# EAGLE board BMS Segment rev9 (EAGLE 9.2.2), part 1 of 2
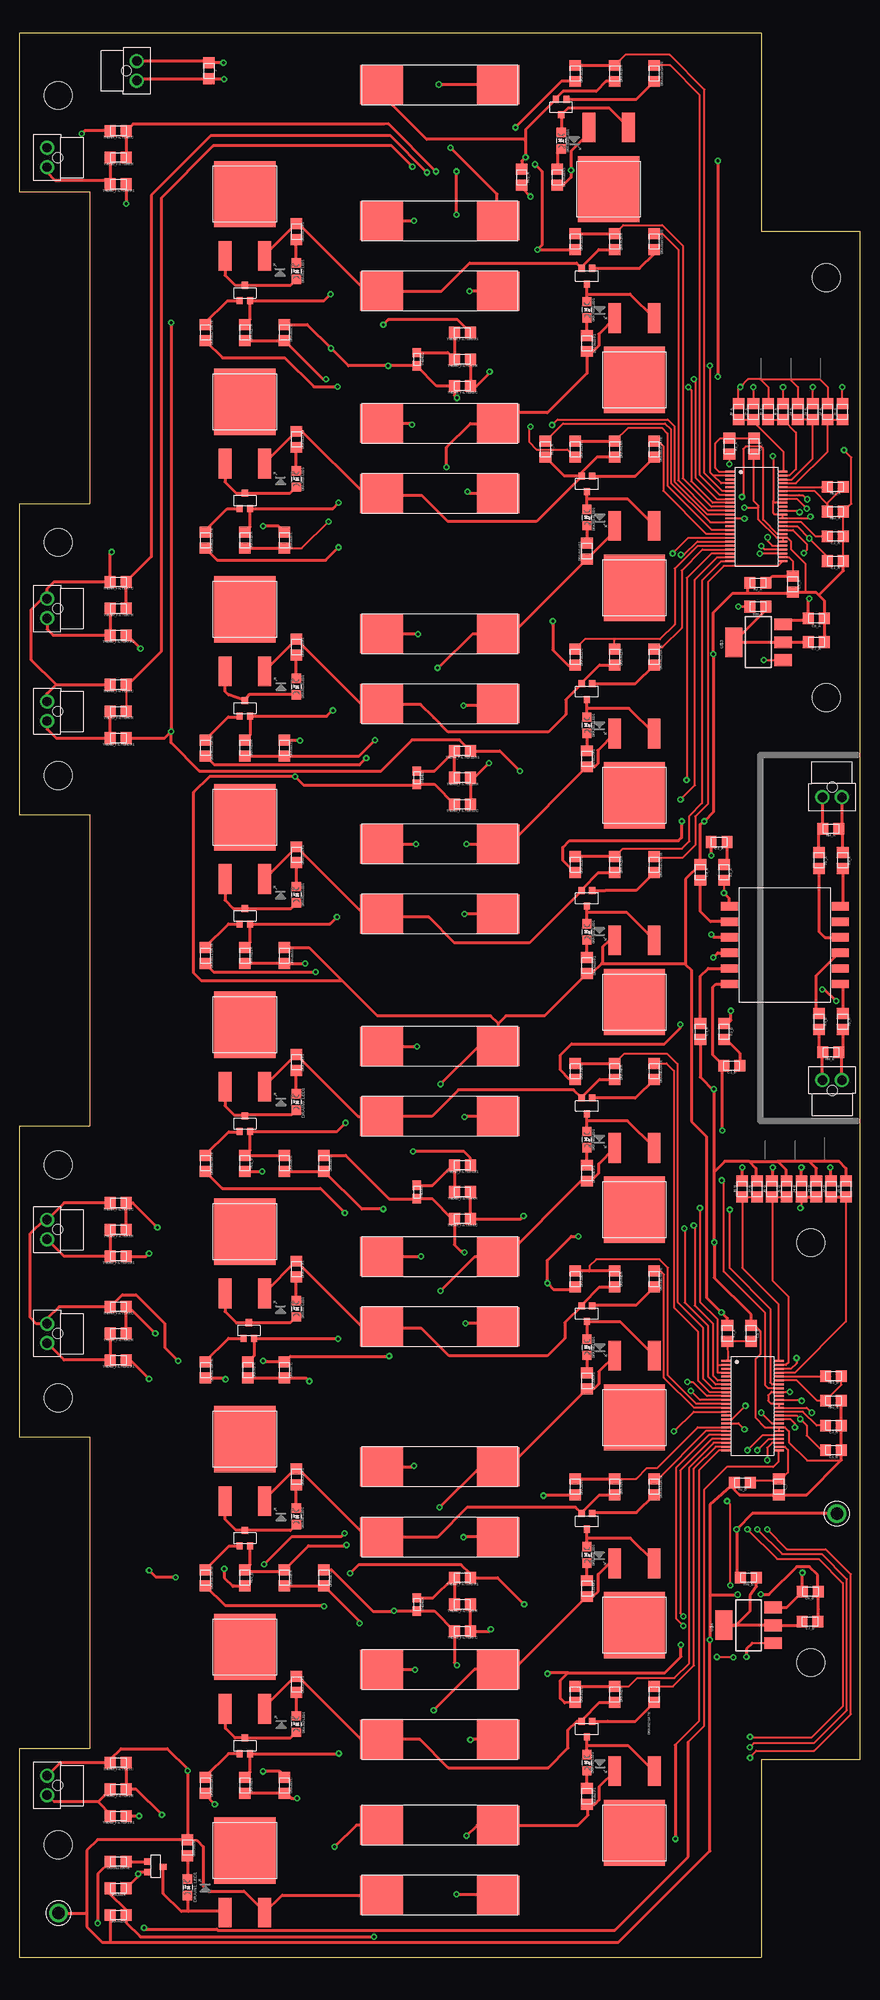
[diagram p0: board, top side]
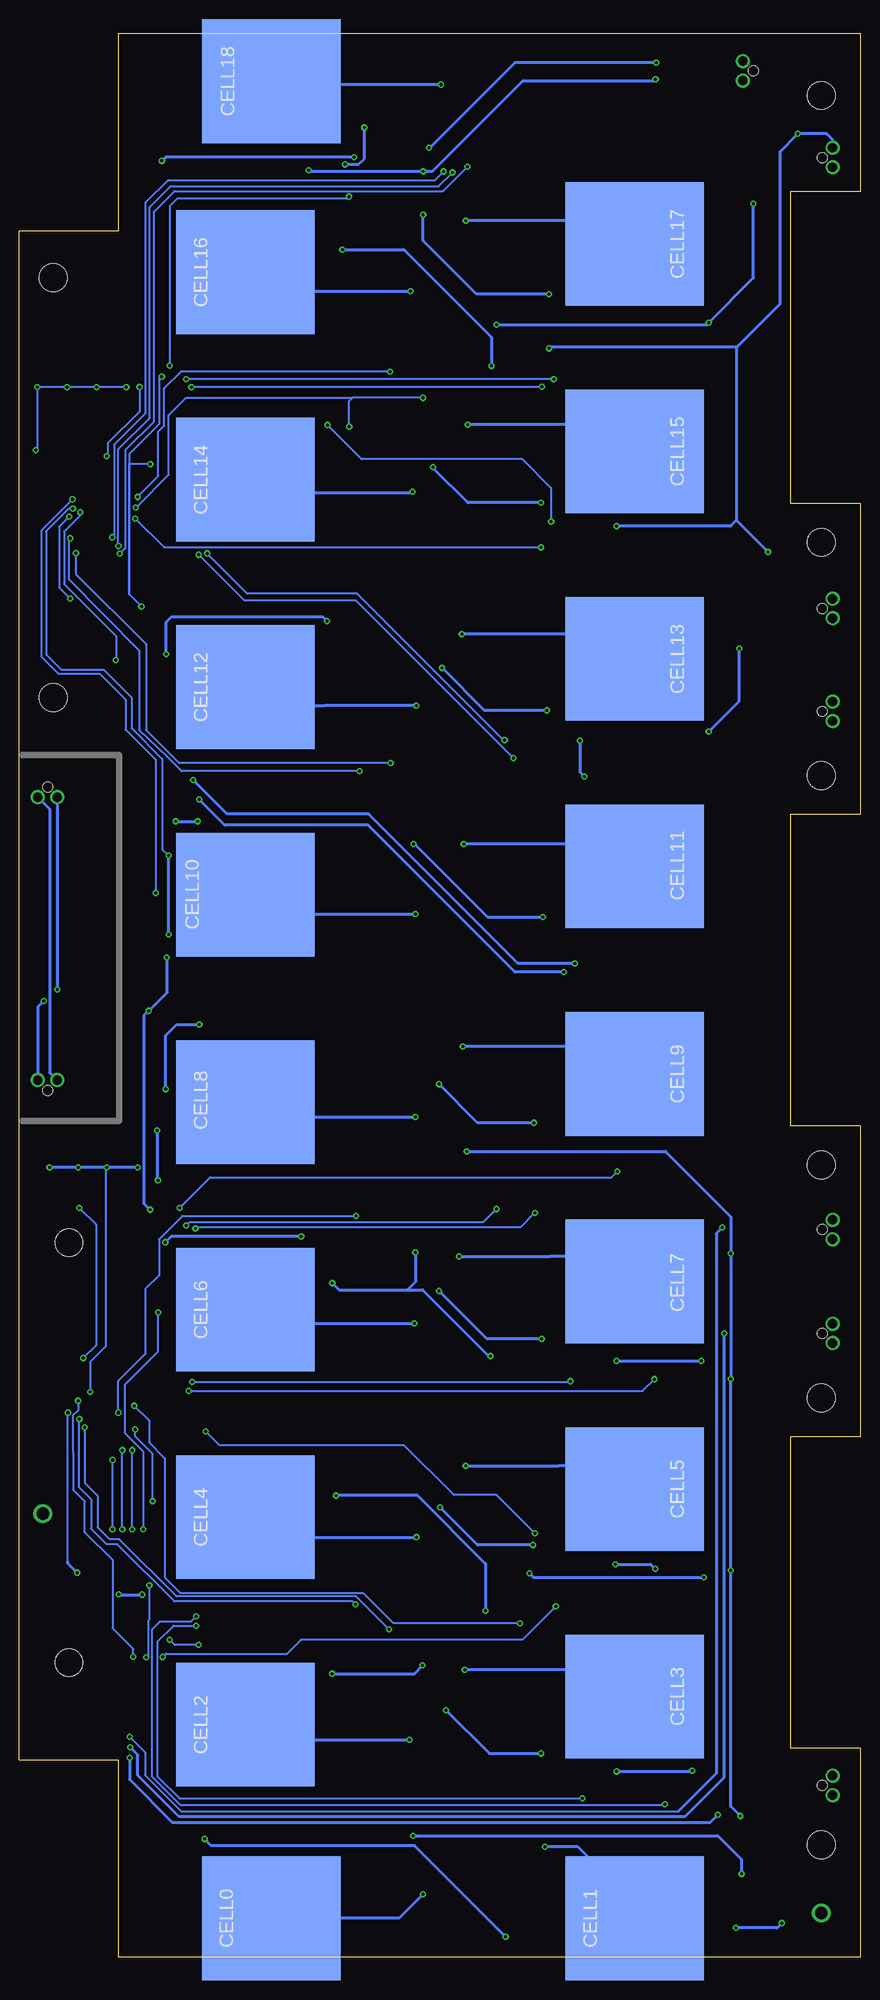
[diagram p1: board, bottom side, seen from below]

Size 108 x 247.11 mm. Coordinates in mm from the lower left corner, seen from the top.
Outline: 9,226.72 9,186.72 0,186.72 0,146.78 9,146.78 9,106.78 0,106.78 0,66.84 9,66.84 9,26.84 0,26.84 0,0 95.3,0 95.3,25.4 108,25.4 108,221.71 95.3,221.71 95.3,247.11 0,247.11 0,226.72 9,226.72
Copper layers (1*16): Top 0.035mm / dielectric 1.5mm / Bottom 0.035mm
Design rules "DRC Advanced Circuits": minimum track width 6mil, minimum drill 15mil, track to track 6mil, track to pad 6mil, pad to pad 6mil, via to via 6mil, smd to smd 6mil, copper to edge 40mil, drill to drill 6mil, minimum pad ring 10mil, minimum via ring 8mil, stop-mask expansion 4mil, vias tented up to drill 0mil, thermal gap 10mil
Net classes: 1 unfused_hv: clearance 0.025 mm to class 0, clearance 3.2 mm
Holes 3.6 mm at 5,239.11 5,181.73 5,151.78 5,101.78 5,71.84 5,14.46 101.65,37.86 101.65,91.78 103.65,161.78 103.65,215.71

## Footprints (pad centres in the part's own frame; a part is rotated, then mirrored left to right if it is on the bottom)
NANO-FIT_VERTICAL-2 = drill 1.2: P$1 -1.25,0; P$2 1.25,0 | hole 1.3: 0,-1.34
0805 = smd 1.4 x 1.5: 1 -1.025,0; 2 1.025,0
KEYSTONE5222 = smd 15.875 x 17.78: P$1 0,0
PWR163 = smd 1.651 x 3.81: 1 -2.54,-7.938; 2 2.54,-7.938 | smd 7.874 x 8.509: PAD 0,0
LED-805 = smd 1.2 x 1.2: A 0,-1.05; C 0,1.05
SOT23 = smd 0.8 x 0.9: 1 -0.675,-1; 2 0.675,-1; 3 0,1
5X20MM_FUSE = smd 5.5 x 5: P$1 -7.5,0; P$2 7.5,0
0603 = smd 1.2 x 1.1: 1 -0.85,0; 2 0.85,0
HM2102NLT = smd 1.067 x 2.184: P$1 0,0; P$2 2,0; P$3 4,0; P$4 6,0; P$5 8,0; P$6 10,0; P$7 10,14.25; P$8 8,14.25; P$9 6,14.25; P$10 4,14.25; P$11 2,14.25; P$12 0,14.25
LTC6804 = smd 0.25 x 1.25: 1 -5.75,-3.37; 2 -5.25,-3.37; 3 -4.75,-3.37; 4 -4.25,-3.37; 5 -3.75,-3.37; 6 -3.25,-3.37; 7 -2.75,-3.37; 8 -2.25,-3.37; 9 -1.75,-3.37; 10 -1.25,-3.37; 11 -0.75,-3.37; 12 -0.25,-3.37; 13 0.25,-3.37; 14 0.75,-3.37; 15 1.25,-3.37; 16 1.75,-3.37; 17 2.25,-3.37; 18 2.75,-3.37; 19 3.25,-3.37; 20 3.75,-3.37; 21 4.25,-3.37; 22 4.75,-3.37; 23 5.25,-3.37; 24 5.75,-3.37; 25 5.75,3.38; 26 5.25,3.38; 27 4.75,3.38; 28 4.25,3.38; 29 3.75,3.38; 30 3.25,3.38; 31 2.75,3.38; 32 2.25,3.38; 33 1.75,3.38; 34 1.25,3.38; 35 0.75,3.38; 36 0.25,3.38; 37 -0.25,3.38; 38 -0.75,3.38; 39 -1.25,3.38; 40 -1.75,3.38; 41 -2.25,3.38; 42 -2.75,3.38; 43 -3.25,3.38; 44 -3.75,3.38; 45 -4.25,3.38; 46 -4.75,3.38; 47 -5.25,3.38; 48 -5.75,3.38
SOT223 = smd 1.5 x 2.235: 1 -2.3,-3.15; 2 0,-3.15; 3 2.3,-3.15 | smd 3.8 x 2.2: 4 0,3.15
TEST_POINT = drill 1.6: P$1 0,0

## Placement (x,y rotation side)
AMS_TEST_PORT1  CONNECTOR-2NANO-FIT_VERTICAL-2  [NANO-FIT_VERTICAL-2]  15.08,242.28 270 top
C1_A  1uF  [0805]  104.82,179.31 0 top
C1_B  1uF  [0805]  104.56,65.14 0 top
C2_A  1uF  [0805]  104.82,182.49 0 top
C2_B  1uF  [0805]  104.56,68.31 0 top
C3_A  15pF  [0805]  89.87,143.24 180 top
C3_B  15pF  [0805]  91.49,114.5 180 top
C4_A  10nF  [0805]  87.46,139.35 90 top
C4_B  10nF  [0805]  87.46,118.9 270 top
C5_A  10nF  [0805]  99.33,176.34 270 top
C6_A  0.1uF  [0805]  94.36,194.06 270 top
C6_B  0.1uF  [0805]  93.98,80.14 90 top
C7_A  0.1uF  [0805]  102.36,168.91 0 top
C7_B  0.1uF  [0805]  101.55,43.13 0 top
C8_A  1uF  [0805]  102.36,171.96 0 top
C8_B  1uF  [0805]  101.6,46.99 0 top
C_5  10nF  [0805]  97.54,60.45 270 top
CELL0  BATTERY_SPRING_KEYSTONE5222  [KEYSTONE5222]  75.66,5.04 270 bottom
CELL1  BATTERY_SPRING_KEYSTONE5222  [KEYSTONE5222]  29,5.04 270 bottom
CELL2  BATTERY_SPRING_KEYSTONE5222  [KEYSTONE5222]  79,29.89 270 bottom
CELL3  BATTERY_SPRING_KEYSTONE5222  [KEYSTONE5222]  29,33.52 270 bottom
CELL4  BATTERY_SPRING_KEYSTONE5222  [KEYSTONE5222]  79,56.54 270 bottom
CELL5  BATTERY_SPRING_KEYSTONE5222  [KEYSTONE5222]  29,60.16 270 bottom
CELL6  BATTERY_SPRING_KEYSTONE5222  [KEYSTONE5222]  79,83.19 270 bottom
CELL7  BATTERY_SPRING_KEYSTONE5222  [KEYSTONE5222]  29,86.81 270 bottom
CELL8  BATTERY_SPRING_KEYSTONE5222  [KEYSTONE5222]  79,109.83 270 bottom
CELL9  BATTERY_SPRING_KEYSTONE5222  [KEYSTONE5222]  29,113.46 270 bottom
CELL10  BATTERY_SPRING_KEYSTONE5222  [KEYSTONE5222]  79,136.48 270 bottom
CELL11  BATTERY_SPRING_KEYSTONE5222  [KEYSTONE5222]  29,140.11 270 bottom
CELL12  BATTERY_SPRING_KEYSTONE5222  [KEYSTONE5222]  79,163.13 270 bottom
CELL13  BATTERY_SPRING_KEYSTONE5222  [KEYSTONE5222]  29,166.75 270 bottom
CELL14  BATTERY_SPRING_KEYSTONE5222  [KEYSTONE5222]  79,189.78 270 bottom
CELL15  BATTERY_SPRING_KEYSTONE5222  [KEYSTONE5222]  29,193.4 270 bottom
CELL16  BATTERY_SPRING_KEYSTONE5222  [KEYSTONE5222]  79,216.42 270 bottom
CELL17  BATTERY_SPRING_KEYSTONE5222  [KEYSTONE5222]  29,220.05 270 bottom
CELL18  BATTERY_SPRING_KEYSTONE5222  [KEYSTONE5222]  75.66,240.93 270 bottom
DRAIN1:C  10nF  [0805]  12.7,5.46 180 top
DRAIN1:DISCHARGE  5R  [PWR163]  28.96,13.72 0 top
DRAIN1:GATE  3K3  [0805]  12.7,12.32 180 top
DRAIN1:LED1  RED  [LED-805]  21.59,9.02 0 top
DRAIN1:PFET  P-CHANNEL_MOSFET_DMP3099L-7  [SOT23]  17.48,11.66 270 top
DRAIN1:R  100R  [0805]  12.7,8.89 180 top
DRAIN1:R1  150R  [0805]  21.59,14.1 270 top
DRAIN2:C  10nF  [0805]  71.37,33.78 270 top
DRAIN2:DISCHARGE  5R  [PWR163]  79,16 180 top
DRAIN2:GATE  3K3  [0805]  81.53,33.78 90 top
DRAIN2:LED1  RED  [LED-805]  72.9,25.02 180 top
DRAIN2:PFET  P-CHANNEL_MOSFET_DMP3099L-7  [SOT23]  72.9,29.34 180 top
DRAIN2:R  100R  [0805]  76.45,33.78 90 top
DRAIN2:R1  150R  [0805]  72.9,20.7 90 top
DRAIN3:C  10nF  [0805]  34.04,22.1 90 top
DRAIN3:DISCHARGE  5R  [PWR163]  28.96,39.88 0 top
DRAIN3:GATE  3K3  [0805]  23.88,22.1 270 top
DRAIN3:LED1  RED  [LED-805]  35.56,29.97 0 top
DRAIN3:PFET  P-CHANNEL_MOSFET_DMP3099L-7  [SOT23]  28.96,27.18 0 top
DRAIN3:R  100R  [0805]  28.96,22.1 270 top
DRAIN3:R1  150R  [0805]  35.56,35.05 270 top
DRAIN4:C  10nF  [0805]  71.37,60.45 270 top
DRAIN4:DISCHARGE  5R  [PWR163]  78.99,42.67 180 top
DRAIN4:GATE  3K3  [0805]  81.53,60.45 90 top
DRAIN4:LED1  RED  [LED-805]  72.9,51.69 180 top
DRAIN4:PFET  P-CHANNEL_MOSFET_DMP3099L-7  [SOT23]  72.9,56.01 180 top
DRAIN4:R  100R  [0805]  76.45,60.45 90 top
DRAIN4:R1  150R  [0805]  72.9,47.37 90 top
DRAIN5:C  10nF  [0805]  39.12,48.77 90 top
DRAIN5:DISCHARGE  5R  [PWR163]  28.96,66.55 0 top
DRAIN5:GATE  3K3  [0805]  23.88,48.77 270 top
DRAIN5:LED1  RED  [LED-805]  35.56,56.64 0 top
DRAIN5:PFET  P-CHANNEL_MOSFET_DMP3099L-7  [SOT23]  28.96,53.85 0 top
DRAIN5:R  100R  [0805]  34.04,48.77 270 top
DRAIN5:R1  150R  [0805]  35.56,61.72 270 top
DRAIN6:C  10nF  [0805]  71.37,87.12 270 top
DRAIN6:DISCHARGE  5R  [PWR163]  79,69.34 180 top
DRAIN6:GATE  3K3  [0805]  81.53,87.12 90 top
DRAIN6:LED1  RED  [LED-805]  72.9,78.36 180 top
DRAIN6:PFET  P-CHANNEL_MOSFET_DMP3099L-7  [SOT23]  72.9,82.68 180 top
DRAIN6:R  100R  [0805]  76.45,87.12 90 top
DRAIN6:R1  150R  [0805]  72.9,74.04 90 top
DRAIN7:C  10nF  [0805]  34.04,75.44 90 top
DRAIN7:DISCHARGE  5R  [PWR163]  28.96,93.22 0 top
DRAIN7:GATE  3K3  [0805]  23.88,75.44 270 top
DRAIN7:LED1  RED  [LED-805]  35.56,83.31 0 top
DRAIN7:PFET  P-CHANNEL_MOSFET_DMP3099L-7  [SOT23]  29.46,80.52 0 top
DRAIN7:R  100R  [0805]  29.34,75.44 270 top
DRAIN7:R1  150R  [0805]  35.56,88.39 270 top
DRAIN8:C  10nF  [0805]  71.37,113.79 270 top
DRAIN8:DISCHARGE  5R  [PWR163]  78.99,96.01 180 top
DRAIN8:GATE  3K3  [0805]  81.53,113.79 90 top
DRAIN8:LED1  RED  [LED-805]  72.9,105.03 180 top
DRAIN8:PFET  P-CHANNEL_MOSFET_DMP3099L-7  [SOT23]  72.9,109.35 180 top
DRAIN8:R  100R  [0805]  76.45,113.79 90 top
DRAIN8:R1  150R  [0805]  72.9,100.71 90 top
DRAIN9:C  10nF  [0805]  39.12,101.98 90 top
DRAIN9:DISCHARGE  5R  [PWR163]  28.96,119.76 0 top
DRAIN9:GATE  3K3  [0805]  23.88,101.98 270 top
DRAIN9:LED1  RED  [LED-805]  35.56,109.86 0 top
DRAIN9:PFET  P-CHANNEL_MOSFET_DMP3099L-7  [SOT23]  28.96,107.06 0 top
DRAIN9:R  100R  [0805]  34.04,101.98 270 top
DRAIN9:R1  150R  [0805]  35.56,114.94 270 top
DRAIN10:C  10nF  [0805]  71.37,140.34 270 top
DRAIN10:DISCHARGE  5R  [PWR163]  78.99,122.68 180 top
DRAIN10:GATE  3K3  [0805]  81.53,140.34 90 top
DRAIN10:LED1  RED  [LED-805]  72.9,131.7 180 top
DRAIN10:PFET  P-CHANNEL_MOSFET_DMP3099L-7  [SOT23]  72.9,136.02 180 top
DRAIN10:R  100R  [0805]  76.45,140.34 90 top
DRAIN10:R1  150R  [0805]  72.9,127.38 90 top
DRAIN11:C  10nF  [0805]  34.04,128.65 90 top
DRAIN11:DISCHARGE  5R  [PWR163]  28.96,146.43 0 top
DRAIN11:GATE  3K3  [0805]  23.88,128.65 270 top
DRAIN11:LED1  RED  [LED-805]  35.56,136.47 0 top
DRAIN11:PFET  P-CHANNEL_MOSFET_DMP3099L-7  [SOT23]  28.96,133.73 0 top
DRAIN11:R  100R  [0805]  28.96,128.65 270 top
DRAIN11:R1  150R  [0805]  35.56,141.6 270 top
DRAIN12:C  10nF  [0805]  71.37,167 270 top
DRAIN12:DISCHARGE  5R  [PWR163]  78.99,149.22 180 top
DRAIN12:GATE  3K3  [0805]  81.53,167 90 top
DRAIN12:LED1  RED  [LED-805]  72.9,158.24 180 top
DRAIN12:PFET  P-CHANNEL_MOSFET_DMP3099L-7  [SOT23]  72.9,162.56 180 top
DRAIN12:R  100R  [0805]  76.45,167 90 top
DRAIN12:R1  150R  [0805]  72.9,153.92 90 top
DRAIN13:C  10nF  [0805]  34.04,155.32 90 top
DRAIN13:DISCHARGE  5R  [PWR163]  28.96,173.1 0 top
DRAIN13:GATE  3K3  [0805]  23.88,155.32 270 top
DRAIN13:LED1  RED  [LED-805]  35.56,163.19 0 top
DRAIN13:PFET  P-CHANNEL_MOSFET_DMP3099L-7  [SOT23]  28.96,160.4 0 top
DRAIN13:R  100R  [0805]  28.96,155.32 270 top
DRAIN13:R1  150R  [0805]  35.56,168.28 270 top
DRAIN14:C  10nF  [0805]  71.37,193.68 270 top
DRAIN14:DISCHARGE  5R  [PWR163]  78.99,175.9 180 top
DRAIN14:GATE  3K3  [0805]  81.53,193.68 90 top
DRAIN14:LED1  RED  [LED-805]  72.9,184.91 180 top
DRAIN14:PFET  P-CHANNEL_MOSFET_DMP3099L-7  [SOT23]  72.9,189.23 180 top
DRAIN14:R  100R  [0805]  76.45,193.68 90 top
DRAIN14:R1  150R  [0805]  72.9,180.59 90 top
DRAIN15:C  10nF  [0805]  34.04,181.99 90 top
DRAIN15:DISCHARGE  5R  [PWR163]  28.96,199.77 0 top
DRAIN15:GATE  3K3  [0805]  23.88,181.99 270 top
DRAIN15:LED1  RED  [LED-805]  35.56,189.87 0 top
DRAIN15:PFET  P-CHANNEL_MOSFET_DMP3099L-7  [SOT23]  28.96,187.07 0 top
DRAIN15:R  100R  [0805]  28.96,181.99 270 top
DRAIN15:R1  150R  [0805]  35.56,194.94 270 top
DRAIN16:C  10nF  [0805]  71.37,220.34 270 top
DRAIN16:DISCHARGE  5R  [PWR163]  78.99,202.56 180 top
DRAIN16:GATE  3K3  [0805]  81.53,220.34 90 top
DRAIN16:LED1  RED  [LED-805]  72.9,211.58 180 top
DRAIN16:PFET  P-CHANNEL_MOSFET_DMP3099L-7  [SOT23]  72.9,215.9 180 top
DRAIN16:R  100R  [0805]  76.45,220.34 90 top
DRAIN16:R1  150R  [0805]  72.9,207.26 90 top
DRAIN17:C  10nF  [0805]  34.04,208.66 90 top
DRAIN17:DISCHARGE  5R  [PWR163]  28.96,226.44 0 top
DRAIN17:GATE  3K3  [0805]  23.88,208.66 270 top
DRAIN17:LED1  RED  [LED-805]  35.56,216.53 0 top
DRAIN17:PFET  P-CHANNEL_MOSFET_DMP3099L-7  [SOT23]  28.96,213.74 0 top
DRAIN17:R  100R  [0805]  28.96,208.66 270 top
DRAIN17:R1  150R  [0805]  35.56,221.62 270 top
DRAIN18:C  10nF  [0805]  71.37,241.94 270 top
DRAIN18:DISCHARGE  5R  [PWR163]  75.69,227.08 180 top
DRAIN18:GATE  3K3  [0805]  81.53,241.94 90 top
DRAIN18:LED1  RED  [LED-805]  69.6,233.3 180 top
DRAIN18:PFET  P-CHANNEL_MOSFET_DMP3099L-7  [SOT23]  69.6,237.62 180 top
DRAIN18:R  100R  [0805]  76.45,241.94 90 top
DRAIN18:R1  150R  [0805]  69.09,228.6 90 top
F0  0001.2704.11  [5X20MM_FUSE]  54,8 180 top
F1  0001.2704.11  [5X20MM_FUSE]  54,17 0 top
F2  0001.2704.11  [5X20MM_FUSE]  54,28 180 top
F3  0001.2704.11  [5X20MM_FUSE]  54,37 0 top
F4  0001.2704.11  [5X20MM_FUSE]  54,54 180 top
F5  0001.2704.11  [5X20MM_FUSE]  54,63 0 top
F6  0001.2704.11  [5X20MM_FUSE]  54,81 180 top
F7  0001.2704.11  [5X20MM_FUSE]  54,90 0 top
F8  0001.2704.11  [5X20MM_FUSE]  54,108 180 top
F9  0001.2704.11  [5X20MM_FUSE]  54,117 0 top
F10  0001.2704.11  [5X20MM_FUSE]  54,134 180 top
F11  0001.2704.11  [5X20MM_FUSE]  54,143 0 top
F12  0001.2704.11  [5X20MM_FUSE]  54,161 180 top
F13  0001.2704.11  [5X20MM_FUSE]  54,170 0 top
F14  0001.2704.11  [5X20MM_FUSE]  54,188 180 top
F15  0001.2704.11  [5X20MM_FUSE]  54,197 0 top
F16  0001.2704.11  [5X20MM_FUSE]  54,214 180 top
F17  0001.2704.11  [5X20MM_FUSE]  54,223 0 top
F18  0001.2704.11  [5X20MM_FUSE]  54,240.48 180 top
ISOSPI_A  CONNECTOR-2NANO-FIT_VERTICAL-2  [NANO-FIT_VERTICAL-2]  104.39,148.98 180 top
ISOSPI_B  CONNECTOR-2NANO-FIT_VERTICAL-2  [NANO-FIT_VERTICAL-2]  104.39,112.66 0 top
J  Jumper  [0805]  24.35,242.28 270 top
J1_A  [0805]  105.71,198.49 90 top
J1_B  [0805]  106.17,98.68 90 top
J2_A  [0805]  103.8,198.49 90 top
J2_B  [0805]  104.27,98.68 90 top
J3_A  [0805]  101.9,198.49 90 top
J3_B  [0805]  102.36,98.68 90 top
J4_A  [0805]  99.99,198.49 90 top
J4_B  [0805]  100.46,98.68 90 top
J5_A  [0805]  98.09,198.49 90 top
J5_B  [0805]  98.55,98.68 90 top
J6_A  [0805]  96.18,198.49 90 top
J6_B  [0805]  96.65,98.68 90 top
J7_A  [0805]  94.28,198.49 90 top
J7_B  [0805]  94.74,98.68 90 top
J8_A  [0805]  92.37,198.49 90 top
J8_B  [0805]  92.84,98.68 90 top
R1_A  100R  [0805]  91.19,194.06 90 top
R1_B  100R  [0805]  90.93,80.14 270 top
R2_A  100R  [0805]  94.87,176.53 0 top
R2_B  100R  [0805]  92.88,60.96 0 top
R3_A  402R  [0805]  90.51,139.35 90 top
R3_B  402R  [0805]  90.51,118.9 270 top
R4_A  22R  [0805]  105.75,140.87 90 top
R4_B  22R  [0805]  102.7,120.17 270 top
R5_A  22R  [0805]  102.7,140.87 90 top
R5_B  22R  [0805]  105.75,120.17 270 top
RB1_A  1K2  [0805]  104.82,188.84 180 top
RB1_B  1K2  [0805]  104.56,74.66 180 top
RB2_A  806R  [0805]  104.82,185.66 180 top
RB2_B  806R  [0805]  104.56,71.49 180 top
RIN_A  100R  [0805]  94.87,173.48 0 top
RIN_B  100R  [0805]  93.64,48.77 0 top
RM_A  100R  [0805]  104.22,144.93 180 top
RM_B  100R  [0805]  104.22,116.23 0 top
RU1_A  100R  [0805]  64.52,228.6 270 top
RU1_B  100R  [0805]  28.96,101.98 270 top
RU2_A  100R  [0805]  67.56,193.68 90 top
RU2_B  100R  [0805]  28.96,48.77 270 top
THERM1  10K  [0603]  51.05,205.23 90 top
THERM1_A  Th1  [NANO-FIT_VERTICAL-2]  3.56,160.02 90 top
THERM1_B  Th1  [NANO-FIT_VERTICAL-2]  3.56,22.1 90 top
THERM2  10K  [0603]  51.05,151.51 90 top
THERM2_A  Th1  [NANO-FIT_VERTICAL-2]  3.56,173.23 90 top
THERM2_B  Th1  [NANO-FIT_VERTICAL-2]  3.56,80.14 90 top
THERM3  10K  [0603]  51.05,98.3 90 top
THERM3_A  Th1  [NANO-FIT_VERTICAL-2]  3.56,231.14 90 top
THERM3_B  Th1  [NANO-FIT_VERTICAL-2]  3.56,93.47 90 top
THERM4  10K  [0603]  51.05,45.34 90 top
THERM_FILTER1:C  10nF  [0805]  12.7,25.02 180 top
THERM_FILTER1:R  100R  [0805]  12.7,21.59 180 top
THERM_FILTER1:R1  10K  [0805]  12.7,18.16 180 top
THERM_FILTER2:C  10nF  [0805]  12.7,83.57 180 top
THERM_FILTER2:R  100R  [0805]  12.7,80.14 180 top
THERM_FILTER2:R1  10K  [0805]  12.7,76.71 180 top
THERM_FILTER3:C  10nF  [0805]  12.7,96.9 180 top
THERM_FILTER3:R  100R  [0805]  12.7,93.47 180 top
THERM_FILTER3:R1  10K  [0805]  12.7,90.04 180 top
THERM_FILTER4:C  10nF  [0805]  56.9,94.87 180 top
THERM_FILTER4:R  100R  [0805]  56.9,98.3 180 top
THERM_FILTER4:R1  10K  [0805]  56.9,101.73 180 top
THERM_FILTER5:C  10nF  [0805]  56.9,41.91 180 top
THERM_FILTER5:R  100R  [0805]  56.9,45.34 180 top
THERM_FILTER5:R1  10K  [0805]  56.9,48.77 180 top
THERM_FILTER6:C  10nF  [0805]  12.7,163.45 180 top
THERM_FILTER6:R  100R  [0805]  12.7,160.02 180 top
THERM_FILTER6:R1  10K  [0805]  12.7,156.59 180 top
THERM_FILTER7:C  10nF  [0805]  12.7,176.66 180 top
THERM_FILTER7:R  100R  [0805]  12.7,173.23 180 top
THERM_FILTER7:R1  10K  [0805]  12.7,169.8 180 top
THERM_FILTER8:C  10nF  [0805]  12.7,234.57 180 top
THERM_FILTER8:R  100R  [0805]  12.7,231.14 180 top
THERM_FILTER8:R1  10K  [0805]  12.7,227.71 180 top
THERM_FILTER9:C  10nF  [0805]  56.9,201.8 180 top
THERM_FILTER9:R  100R  [0805]  56.9,205.23 180 top
THERM_FILTER9:R1  10K  [0805]  56.9,208.66 180 top
THERM_FILTER10:C  10nF  [0805]  56.9,148.08 180 top
THERM_FILTER10:R  100R  [0805]  56.9,151.51 180 top
THERM_FILTER10:R1  10K  [0805]  56.9,154.94 180 top
TRANSFORMER  HM2102NLT  [HM2102NLT]  105.44,125.01 90 top
U$1  LTC6804-2  [LTC6804]  94.66,185.05 270 top
U$2  LTC6804-2  [LTC6804]  94.15,70.84 270 top
U$3  [SOT223]  94.91,168.9 90 top
U$4  [SOT223]  93.64,42.66 90 top
U$5  TEST_POINT  [TEST_POINT]  105,57 90 top
U$6  TEST_POINT  [TEST_POINT]  5,5.7 180 top

## Library data of the parts
AMS_TEST_PORT1 C1_A C1_B C2_A C2_B C3_A C3_B C4_A C4_B C5_A C8_A C8_B C_5 CELL0 CELL1-CELL18 DRAIN1:C DRAIN1:DISCHARGE DRAIN1:GATE DRAIN1:LED1 DRAIN1:PFET DRAIN1:R DRAIN1:R1 DRAIN2:C DRAIN2:DISCHARGE DRAIN2:GATE DRAIN2:LED1 DRAIN2:PFET DRAIN2:R DRAIN2:R1 DRAIN3:C DRAIN3:DISCHARGE DRAIN3:GATE DRAIN3:LED1 DRAIN3:PFET DRAIN3:R DRAIN3:R1 DRAIN4:C DRAIN4:DISCHARGE DRAIN4:GATE DRAIN4:LED1 DRAIN4:PFET DRAIN4:R DRAIN4:R1 DRAIN5:C DRAIN5:DISCHARGE DRAIN5:GATE DRAIN5:LED1 DRAIN5:PFET DRAIN5:R DRAIN5:R1 DRAIN6:C DRAIN6:DISCHARGE DRAIN6:GATE DRAIN6:LED1 DRAIN6:PFET DRAIN6:R DRAIN6:R1 DRAIN7:C DRAIN7:DISCHARGE DRAIN7:GATE DRAIN7:LED1 DRAIN7:PFET DRAIN7:R DRAIN7:R1 DRAIN8:C DRAIN8:DISCHARGE DRAIN8:GATE DRAIN8:LED1 DRAIN8:PFET DRAIN8:R DRAIN8:R1 DRAIN9:C DRAIN9:DISCHARGE DRAIN9:GATE DRAIN9:LED1 DRAIN9:PFET DRAIN9:R DRAIN9:R1 DRAIN10:C DRAIN10:DISCHARGE DRAIN10:GATE DRAIN10:LED1 DRAIN10:PFET DRAIN10:R DRAIN10:R1 DRAIN11:C DRAIN11:DISCHARGE DRAIN11:GATE DRAIN11:LED1 DRAIN11:PFET DRAIN11:R DRAIN11:R1 DRAIN12:C DRAIN12:DISCHARGE DRAIN12:GATE DRAIN12:LED1 DRAIN12:PFET DRAIN12:R DRAIN12:R1 DRAIN13:C DRAIN13:DISCHARGE DRAIN13:GATE DRAIN13:LED1 DRAIN13:PFET DRAIN13:R DRAIN13:R1 DRAIN14:C DRAIN14:DISCHARGE DRAIN14:GATE DRAIN14:LED1 DRAIN14:PFET DRAIN14:R DRAIN14:R1 DRAIN15:C DRAIN15:DISCHARGE DRAIN15:GATE DRAIN15:LED1 DRAIN15:PFET DRAIN15:R DRAIN15:R1 DRAIN16:C DRAIN16:DISCHARGE DRAIN16:GATE DRAIN16:LED1 DRAIN16:PFET DRAIN16:R DRAIN16:R1 DRAIN17:C DRAIN17:DISCHARGE DRAIN17:GATE DRAIN17:LED1 DRAIN17:PFET DRAIN17:R DRAIN17:R1 DRAIN18:C DRAIN18:DISCHARGE DRAIN18:GATE DRAIN18:LED1 DRAIN18:PFET DRAIN18:R DRAIN18:R1 F0 F1-F18 ISOSPI_A ISOSPI_B J J1_A J1_B J2_A J2_B J3_A J3_B J4_A J4_B J5_A J5_B J6_A J6_B J7_A J7_B J8_A J8_B R1_A R1_B R2_A R2_B R3_A R3_B R4_A R4_B R5_A R5_B RB1_A RB1_B RB2_A RB2_B RIN_A RIN_B RU1_A RU1_B RU2_A RU2_B THERM1 THERM1_A THERM1_B THERM2 THERM2_A THERM2_B THERM3 THERM3_A THERM3_B THERM4 THERM_FILTER1:C THERM_FILTER1:R THERM_FILTER1:R1 THERM_FILTER2:C THERM_FILTER2:R THERM_FILTER2:R1 THERM_FILTER3:C THERM_FILTER3:R THERM_FILTER3:R1 THERM_FILTER4:C THERM_FILTER4:R THERM_FILTER4:R1 THERM_FILTER5:C THERM_FILTER5:R THERM_FILTER5:R1 THERM_FILTER6:C THERM_FILTER6:R THERM_FILTER6:R1 THERM_FILTER7:C THERM_FILTER7:R THERM_FILTER7:R1 THERM_FILTER8:C THERM_FILTER8:R THERM_FILTER8:R1 THERM_FILTER9:C THERM_FILTER9:R THERM_FILTER9:R1 THERM_FILTER10:C THERM_FILTER10:R THERM_FILTER10:R1 TRANSFORMER U$1-U$6 = HyTechDevices
C6_A C6_B C7_A C7_B = HyTechDevices; VOLTAGE: 100V
RM_A RM_B = HyTechDevices; TYPE: TERMINATION

## Nets
C0_A: C5_A.1 R2_A.2 U$1.26
C0_B: C_5.1 R2_B.2 U$2.26
C1_A: DRAIN10:C.1 DRAIN10:R.2 U$1.24
C1_B: DRAIN1:C.1 DRAIN1:R.2 U$2.24
C2_A: DRAIN11:C.1 DRAIN11:R.2 U$1.22
C2_B: DRAIN2:C.1 DRAIN2:R.2 U$2.22
C3_A: DRAIN12:C.1 DRAIN12:R.2 U$1.20
C3_B: DRAIN3:C.1 DRAIN3:R.2 U$2.20
C4_A: DRAIN13:C.1 DRAIN13:R.2 U$1.18
C4_B: DRAIN4:C.1 DRAIN4:R.2 U$2.18
C5_A: DRAIN14:C.1 DRAIN14:R.2 U$1.16
C5_B: DRAIN5:C.1 DRAIN5:R.2 U$2.16
C7_A: DRAIN15:C.1 DRAIN15:R.2 U$1.12
C7_B: DRAIN6:C.1 DRAIN6:R.2 U$2.12
C8_A: DRAIN16:C.1 DRAIN16:R.2 U$1.10
C8_B: DRAIN7:C.1 DRAIN7:R.2 U$2.10
C9_A: DRAIN17:C.1 DRAIN17:R.2 U$1.8
C9_B: DRAIN8:C.1 DRAIN8:R.2 U$2.8
C10_A: DRAIN18:C.1 DRAIN18:R.2 U$1.6
C10_B: DRAIN9:C.1 DRAIN9:R.2 U$2.6
CC0 [unfused_hv]: CELL0.P$1 F0.P$1
CC1 [unfused_hv]: CELL1.P$1 F1.P$1
CC2 [unfused_hv]: CELL2.P$1 F2.P$1
CC3 [unfused_hv]: CELL3.P$1 F3.P$1
CC4 [unfused_hv]: CELL4.P$1 F4.P$1
CC5 [unfused_hv]: CELL5.P$1 F5.P$1
CC6 [unfused_hv]: CELL6.P$1 F6.P$1
CC7 [unfused_hv]: CELL7.P$1 F7.P$1
CC8 [unfused_hv]: CELL8.P$1 F8.P$1
CC9 [unfused_hv]: CELL9.P$1 F9.P$1
CC10 [unfused_hv]: CELL10.P$1 F10.P$1
CC11 [unfused_hv]: CELL11.P$1 F11.P$1
CC12 [unfused_hv]: CELL12.P$1 F12.P$1
CC13 [unfused_hv]: CELL13.P$1 F13.P$1
CC14 [unfused_hv]: CELL14.P$1 F14.P$1
CC15 [unfused_hv]: CELL15.P$1 F15.P$1
CC16 [unfused_hv]: CELL16.P$1 F16.P$1
CC17 [unfused_hv]: CELL17.P$1 F17.P$1
CC18 [unfused_hv]: CELL18.P$1 F18.P$1
DRAIN1:GATE: DRAIN1:GATE.1 DRAIN1:PFET.1
DRAIN1:N$1: DRAIN1:DISCHARGE.1 DRAIN1:LED1.A DRAIN1:PFET.3
DRAIN1:N$2: DRAIN1:LED1.C DRAIN1:R1.2
DRAIN2:GATE: DRAIN2:GATE.1 DRAIN2:PFET.1
DRAIN2:N$1: DRAIN2:DISCHARGE.1 DRAIN2:LED1.A DRAIN2:PFET.3
DRAIN2:N$2: DRAIN2:LED1.C DRAIN2:R1.2
DRAIN3:GATE: DRAIN3:GATE.1 DRAIN3:PFET.1
DRAIN3:N$1: DRAIN3:DISCHARGE.1 DRAIN3:LED1.A DRAIN3:PFET.3
DRAIN3:N$2: DRAIN3:LED1.C DRAIN3:R1.2
DRAIN4:GATE: DRAIN4:GATE.1 DRAIN4:PFET.1
DRAIN4:N$1: DRAIN4:DISCHARGE.1 DRAIN4:LED1.A DRAIN4:PFET.3
DRAIN4:N$2: DRAIN4:LED1.C DRAIN4:R1.2
DRAIN5:GATE: DRAIN5:GATE.1 DRAIN5:PFET.1
DRAIN5:N$1: DRAIN5:DISCHARGE.1 DRAIN5:LED1.A DRAIN5:PFET.3
DRAIN5:N$2: DRAIN5:LED1.C DRAIN5:R1.2
DRAIN6:GATE: DRAIN6:GATE.1 DRAIN6:PFET.1
DRAIN6:N$1: DRAIN6:DISCHARGE.1 DRAIN6:LED1.A DRAIN6:PFET.3
DRAIN6:N$2: DRAIN6:LED1.C DRAIN6:R1.2
DRAIN7:GATE: DRAIN7:GATE.1 DRAIN7:PFET.1
DRAIN7:N$1: DRAIN7:DISCHARGE.1 DRAIN7:LED1.A DRAIN7:PFET.3
DRAIN7:N$2: DRAIN7:LED1.C DRAIN7:R1.2
DRAIN8:GATE: DRAIN8:GATE.1 DRAIN8:PFET.1
DRAIN8:N$1: DRAIN8:DISCHARGE.1 DRAIN8:LED1.A DRAIN8:PFET.3
DRAIN8:N$2: DRAIN8:LED1.C DRAIN8:R1.2
DRAIN9:GATE: DRAIN9:GATE.1 DRAIN9:PFET.1
DRAIN9:N$1: DRAIN9:DISCHARGE.1 DRAIN9:LED1.A DRAIN9:PFET.3
DRAIN9:N$2: DRAIN9:LED1.C DRAIN9:R1.2
DRAIN10:GATE: DRAIN10:GATE.1 DRAIN10:PFET.1
DRAIN10:N$1: DRAIN10:DISCHARGE.1 DRAIN10:LED1.A DRAIN10:PFET.3
DRAIN10:N$2: DRAIN10:LED1.C DRAIN10:R1.2
DRAIN11:GATE: DRAIN11:GATE.1 DRAIN11:PFET.1
DRAIN11:N$1: DRAIN11:DISCHARGE.1 DRAIN11:LED1.A DRAIN11:PFET.3
DRAIN11:N$2: DRAIN11:LED1.C DRAIN11:R1.2
DRAIN12:GATE: DRAIN12:GATE.1 DRAIN12:PFET.1
DRAIN12:N$1: DRAIN12:DISCHARGE.1 DRAIN12:LED1.A DRAIN12:PFET.3
DRAIN12:N$2: DRAIN12:LED1.C DRAIN12:R1.2
DRAIN13:GATE: DRAIN13:GATE.1 DRAIN13:PFET.1
DRAIN13:N$1: DRAIN13:DISCHARGE.1 DRAIN13:LED1.A DRAIN13:PFET.3
DRAIN13:N$2: DRAIN13:LED1.C DRAIN13:R1.2
DRAIN14:GATE: DRAIN14:GATE.1 DRAIN14:PFET.1
DRAIN14:N$1: DRAIN14:DISCHARGE.1 DRAIN14:LED1.A DRAIN14:PFET.3
DRAIN14:N$2: DRAIN14:LED1.C DRAIN14:R1.2
DRAIN15:GATE: DRAIN15:GATE.1 DRAIN15:PFET.1
DRAIN15:N$1: DRAIN15:DISCHARGE.1 DRAIN15:LED1.A DRAIN15:PFET.3
DRAIN15:N$2: DRAIN15:LED1.C DRAIN15:R1.2
DRAIN16:GATE: DRAIN16:GATE.1 DRAIN16:PFET.1
DRAIN16:N$1: DRAIN16:DISCHARGE.1 DRAIN16:LED1.A DRAIN16:PFET.3
DRAIN16:N$2: DRAIN16:LED1.C DRAIN16:R1.2
DRAIN17:GATE: DRAIN17:GATE.1 DRAIN17:PFET.1
DRAIN17:N$1: DRAIN17:DISCHARGE.1 DRAIN17:LED1.A DRAIN17:PFET.3
DRAIN17:N$2: DRAIN17:LED1.C DRAIN17:R1.2
DRAIN18:GATE: DRAIN18:GATE.1 DRAIN18:PFET.1
DRAIN18:N$1: DRAIN18:DISCHARGE.1 DRAIN18:LED1.A DRAIN18:PFET.3
DRAIN18:N$2: DRAIN18:LED1.C DRAIN18:R1.2
DRIVE_A: U$1.38 U$3.1
DRIVE_B: U$2.38 U$4.1
GPIO1_A: THERM_FILTER6:C.1 THERM_FILTER6:R.1 U$1.27
GPIO1_B: THERM_FILTER1:C.1 THERM_FILTER1:R.1 U$2.27
GPIO2_A: THERM_FILTER7:C.1 THERM_FILTER7:R.1 U$1.28
GPIO2_B: THERM_FILTER2:C.1 THERM_FILTER2:R.1 U$2.28
GPIO3_A: THERM_FILTER8:C.1 THERM_FILTER8:R.1 U$1.29
GPIO3_B: THERM_FILTER3:C.1 THERM_FILTER3:R.1 U$2.29
GPIO4_A: THERM_FILTER9:C.1 THERM_FILTER9:R.1 U$1.32
GPIO4_B: THERM_FILTER4:C.1 THERM_FILTER4:R.1 U$2.32
GPIO5_A: THERM_FILTER10:C.1 THERM_FILTER10:R.1 U$1.33
GPIO5_B: THERM_FILTER5:C.1 THERM_FILTER5:R.1 U$2.33
IM_A: C3_A.2 TRANSFORMER.P$9 U$1.41
IM_B: C3_B.2 TRANSFORMER.P$12 U$2.41
IP_A: R3_A.1 TRANSFORMER.P$7 U$1.42
IP_B: R3_B.1 TRANSFORMER.P$10 U$2.42
ISOSPI-M: ISOSPI_A.P$2 ISOSPI_B.P$2 R5_A.2 R5_B.2 RM_A.2 RM_B.2
ISOSPI-P: ISOSPI_A.P$1 ISOSPI_B.P$1 R4_A.2 R4_B.2 RM_A.1 RM_B.1
N$1: C4_B.1 TRANSFORMER.P$11
N$2: RB1_B.2 U$2.44
N$3: THERM1_B.P$1 THERM_FILTER1:R1.2 THERM_FILTER1:R.2
N$4: RB1_B.1 RB2_B.2 U$2.43
N$5: R4_B.1 TRANSFORMER.P$3
N$6: RB1_A.2 U$1.44
N$7: R5_B.1 TRANSFORMER.P$1
N$8: J7_B.1 J8_B.1 U$2.48
N$9: J5_B.1 J6_B.1 U$2.47
N$10: C3_B.1 R3_B.2
N$13: J3_B.1 J4_B.1 U$2.46
N$16: J1_B.1 J2_B.1 U$2.45
N$17: THERM4.2 THERM_FILTER5:R1.2 THERM_FILTER5:R.2
N$18: THERM2_B.P$1 THERM_FILTER2:R1.2 THERM_FILTER2:R.2
N$19: THERM3.2 THERM_FILTER4:R1.2 THERM_FILTER4:R.2
N$20: RB1_A.1 RB2_A.2 U$1.43
N$21: C4_A.1 TRANSFORMER.P$8
N$22: R4_A.1 TRANSFORMER.P$6
N$23: R5_A.1 TRANSFORMER.P$4
N$24: C3_A.1 R3_A.2
N$26: THERM3_B.P$1 THERM_FILTER3:R1.2 THERM_FILTER3:R.2
N$30: J7_A.1 J8_A.1 U$1.48
N$31: J5_A.1 J6_A.1 U$1.47
N$32: J3_A.1 J4_A.1 U$1.46
N$33: J1_A.1 J2_A.1 U$1.45
N$34: THERM1.2 THERM_FILTER9:R1.2 THERM_FILTER9:R.2
N$35: THERM3_A.P$1 THERM_FILTER8:R1.2 THERM_FILTER8:R.2
N$36: THERM2.2 THERM_FILTER10:R1.2 THERM_FILTER10:R.2
N$37: THERM2_A.P$1 THERM_FILTER7:R1.2 THERM_FILTER7:R.2
N$38: THERM1_A.P$1 THERM_FILTER6:R1.2 THERM_FILTER6:R.2
S1_A: DRAIN10:GATE.2 U$1.25
S1_B: DRAIN1:GATE.2 U$2.25
S2_A: DRAIN11:GATE.2 U$1.23
S2_B: DRAIN2:GATE.2 U$2.23
S3_A: DRAIN12:GATE.2 U$1.21
S3_B: DRAIN3:GATE.2 U$2.21
S4_A: DRAIN13:GATE.2 U$1.19
S4_B: DRAIN4:GATE.2 U$2.19
S5_A: DRAIN14:GATE.2 U$1.17
S5_B: DRAIN5:GATE.2 U$2.17
S7_A: DRAIN15:GATE.2 U$1.13
S7_B: DRAIN6:GATE.2 U$2.13
S8_A: DRAIN16:GATE.2 U$1.11
S8_B: DRAIN7:GATE.2 U$2.11
S9_A: DRAIN17:GATE.2 U$1.9
S9_B: DRAIN8:GATE.2 U$2.9
S10_A: DRAIN18:GATE.2 U$1.7
S10_B: DRAIN9:GATE.2 U$2.7
SENSE1: DRAIN1:PFET.2 DRAIN1:R.1 DRAIN2:DISCHARGE.2 DRAIN2:R1.1 F1.P$2
SENSE2: DRAIN2:PFET.2 DRAIN2:R.1 DRAIN3:DISCHARGE.2 DRAIN3:R1.1 F2.P$2
SENSE3: DRAIN3:PFET.2 DRAIN3:R.1 DRAIN4:DISCHARGE.2 DRAIN4:R1.1 F3.P$2
SENSE4: DRAIN4:PFET.2 DRAIN4:R.1 DRAIN5:DISCHARGE.2 DRAIN5:R1.1 F4.P$2
SENSE5: DRAIN5:PFET.2 DRAIN5:R.1 DRAIN6:DISCHARGE.2 DRAIN6:R1.1 F5.P$2 RU2_B.1
SENSE6: DRAIN6:PFET.2 DRAIN6:R.1 DRAIN7:DISCHARGE.2 DRAIN7:R1.1 F6.P$2
SENSE7: DRAIN7:PFET.2 DRAIN7:R.1 DRAIN8:DISCHARGE.2 DRAIN8:R1.1 F7.P$2
SENSE8: DRAIN8:PFET.2 DRAIN8:R.1 DRAIN9:DISCHARGE.2 DRAIN9:R1.1 F8.P$2
SENSE10: DRAIN10:PFET.2 DRAIN10:R.1 DRAIN11:DISCHARGE.2 DRAIN11:R1.1 F10.P$2
SENSE11: DRAIN11:PFET.2 DRAIN11:R.1 DRAIN12:DISCHARGE.2 DRAIN12:R1.1 F11.P$2
SENSE12: DRAIN12:PFET.2 DRAIN12:R.1 DRAIN13:DISCHARGE.2 DRAIN13:R1.1 F12.P$2
SENSE13: DRAIN13:PFET.2 DRAIN13:R.1 DRAIN14:DISCHARGE.2 DRAIN14:R1.1 F13.P$2
SENSE14: DRAIN14:PFET.2 DRAIN14:R.1 DRAIN15:DISCHARGE.2 DRAIN15:R1.1 F14.P$2 RU2_A.1
SENSE15: DRAIN15:PFET.2 DRAIN15:R.1 DRAIN16:DISCHARGE.2 DRAIN16:R1.1 F15.P$2
SENSE16: DRAIN16:PFET.2 DRAIN16:R.1 DRAIN17:DISCHARGE.2 DRAIN17:R1.1 F16.P$2
SENSE17: AMS_TEST_PORT1.P$2 DRAIN17:PFET.2 DRAIN17:R.1 DRAIN18:DISCHARGE.2 DRAIN18:R1.1 J.2
SENSE17_J: AMS_TEST_PORT1.P$1 F17.P$2 J.1
SENSE18: DRAIN18:PFET.2 DRAIN18:R.1 F18.P$2 R1_A.1 RIN_A.1 RU1_A.1
UNUSED1_A: RU1_A.2 U$1.2 U$1.4
UNUSED1_B: RU1_B.2 U$2.2 U$2.4
UNUSED2_A: RU2_A.2 U$1.14
UNUSED2_B: RU2_B.2 U$2.14
V+_A: C6_A.1 R1_A.2 U$1.1
V+_B: C6_B.1 R1_B.2 U$2.1
V-_A: C1_A.2 C2_A.2 C4_A.2 C5_A.2 C6_A.2 C7_A.2 C8_A.2 DRAIN9:PFET.2 DRAIN9:R.1 DRAIN10:C.2 DRAIN10:DISCHARGE.2 DRAIN10:R1.1 DRAIN11:C.2 DRAIN12:C.2 DRAIN13:C.2 DRAIN14:C.2 DRAIN15:C.2 DRAIN16:C.2 DRAIN17:C.2 DRAIN18:C.2 F9.P$2 J1_A.2 J3_A.2 J5_A.2 J7_A.2 R1_B.1 R2_A.1 RB2_A.1 RIN_B.1 RU1_B.1 THERM1.1 THERM1_A.P$2 THERM2.1 THERM2_A.P$2 THERM3_A.P$2 THERM_FILTER6:C.2 THERM_FILTER7:C.2 THERM_FILTER8:C.2 THERM_FILTER9:C.2 THERM_FILTER10:C.2 U$1.30 U$1.31 U$5.P$1
V-_B: C1_B.2 C2_B.2 C4_B.2 C6_B.2 C7_B.2 C8_B.2 C_5.2 DRAIN1:C.2 DRAIN1:DISCHARGE.2 DRAIN1:R1.1 DRAIN2:C.2 DRAIN3:C.2 DRAIN4:C.2 DRAIN5:C.2 DRAIN6:C.2 DRAIN7:C.2 DRAIN8:C.2 DRAIN9:C.2 F0.P$2 J1_B.2 J3_B.2 J5_B.2 J7_B.2 R2_B.1 RB2_B.1 THERM1_B.P$2 THERM2_B.P$2 THERM3.1 THERM3_B.P$2 THERM4.1 THERM_FILTER1:C.2 THERM_FILTER2:C.2 THERM_FILTER3:C.2 THERM_FILTER4:C.2 THERM_FILTER5:C.2 U$2.30 U$2.31 U$6.P$1
VIN_A: C7_A.1 RIN_A.2 U$3.2 U$3.4
VIN_B: C7_B.1 RIN_B.2 U$4.2 U$4.4
VREF1_A: C2_A.1 U$1.35
VREF1_B: C2_B.1 U$2.35
VREF2_A: C1_A.1 THERM_FILTER6:R1.1 THERM_FILTER7:R1.1 THERM_FILTER8:R1.1 THERM_FILTER9:R1.1 THERM_FILTER10:R1.1 U$1.34
VREF2_B: C1_B.1 THERM_FILTER1:R1.1 THERM_FILTER2:R1.1 THERM_FILTER3:R1.1 THERM_FILTER4:R1.1 THERM_FILTER5:R1.1 U$2.34
VREG_A: C8_A.1 J2_A.2 J4_A.2 J6_A.2 J8_A.2 U$1.36 U$1.37 U$1.40 U$3.3
VREG_B: C8_B.1 J2_B.2 J4_B.2 J6_B.2 J8_B.2 U$2.36 U$2.37 U$2.40 U$4.3